# Altium PCB LED.PcbDoc
Units mil, origin at the board's own origin, x right, y up, seen from the top; angles counter-clockwise.
Board outline 1968.5 x 1968.5 mil, 2 copper layers (Top Layer, Bottom Layer); 50 components, 31 nets, 212 pads, 33 vias.
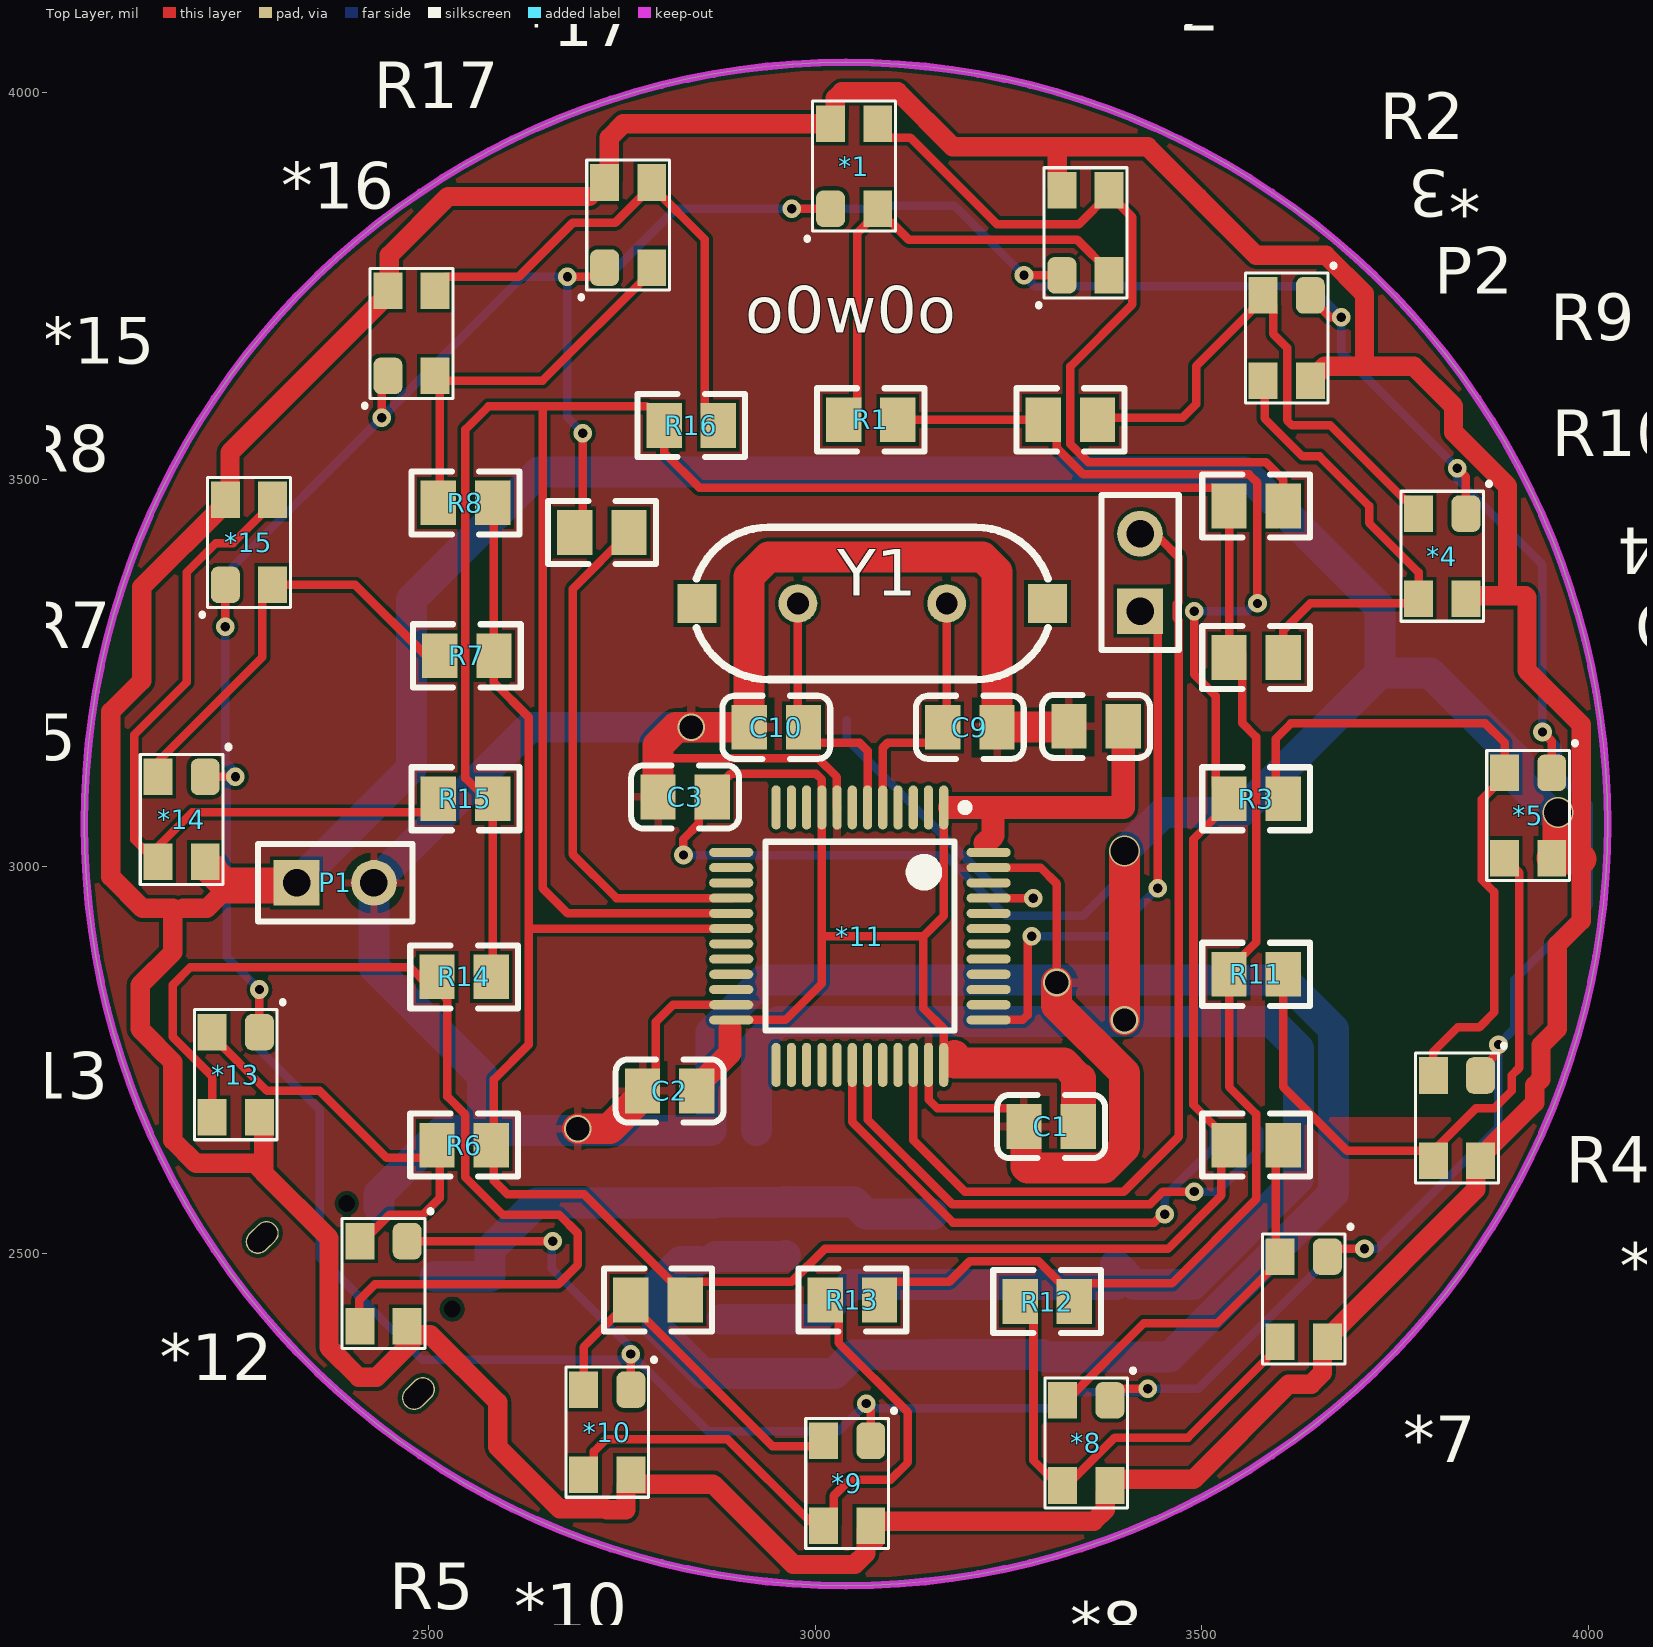
[diagram p0: Top Layer view]
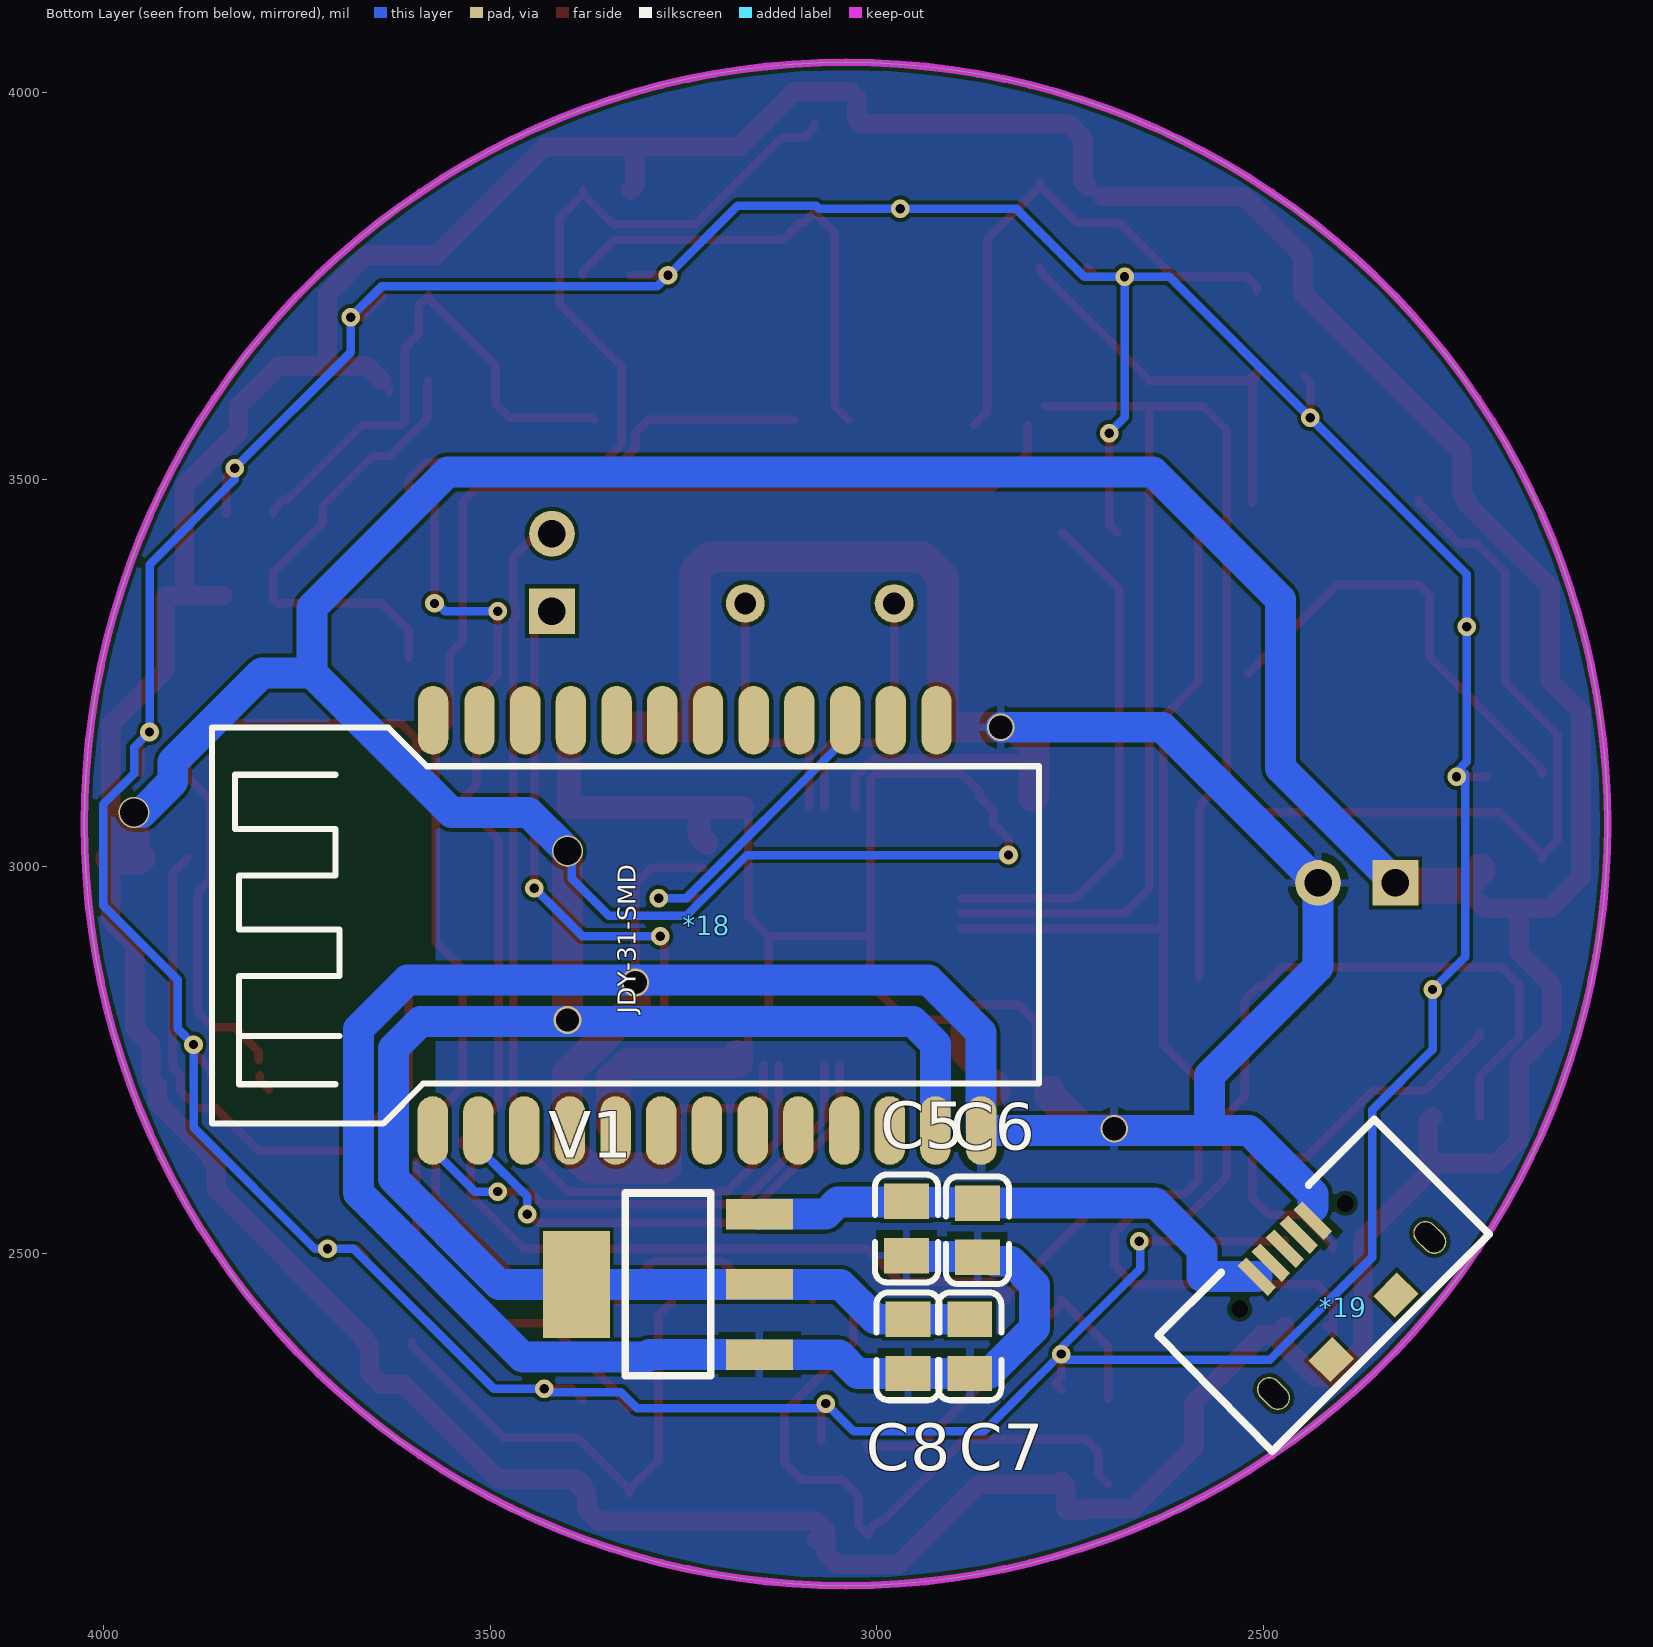
[diagram p1: Bottom Layer view, seen from below]
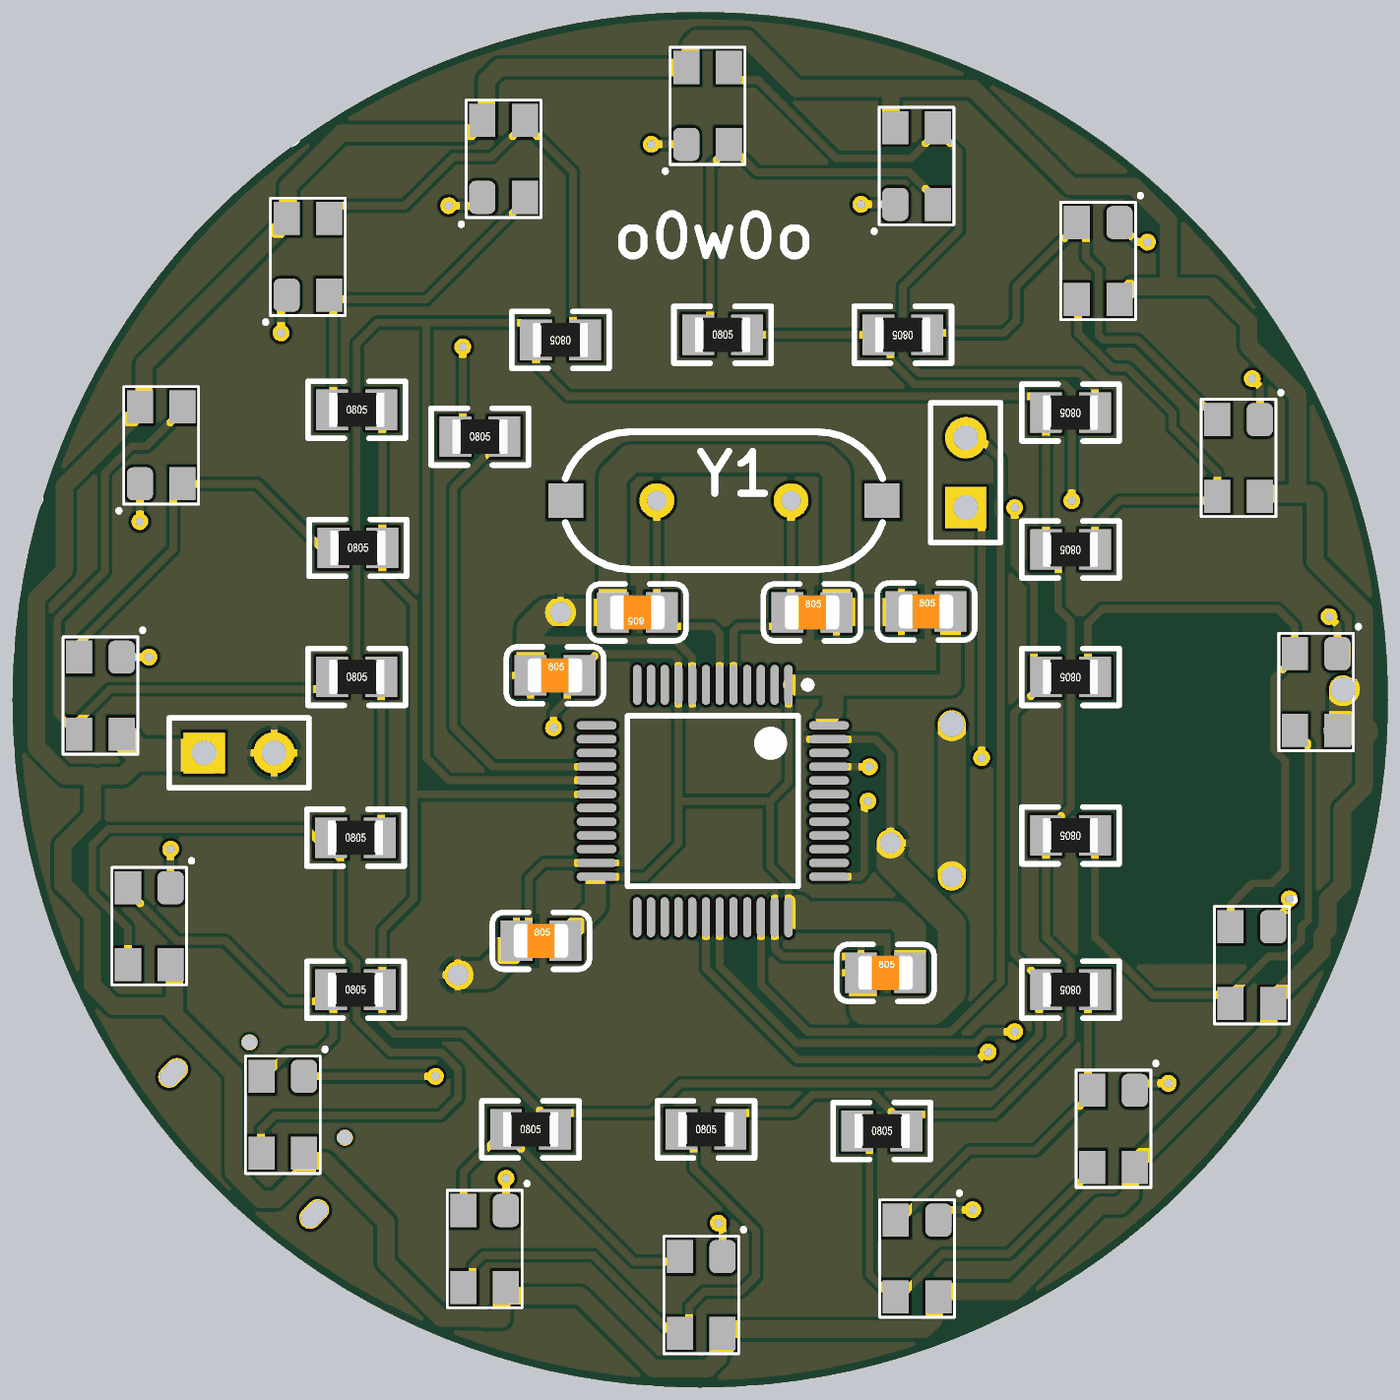
[diagram p2: 3D render of the assembled board from above, using the file's embedded part models]
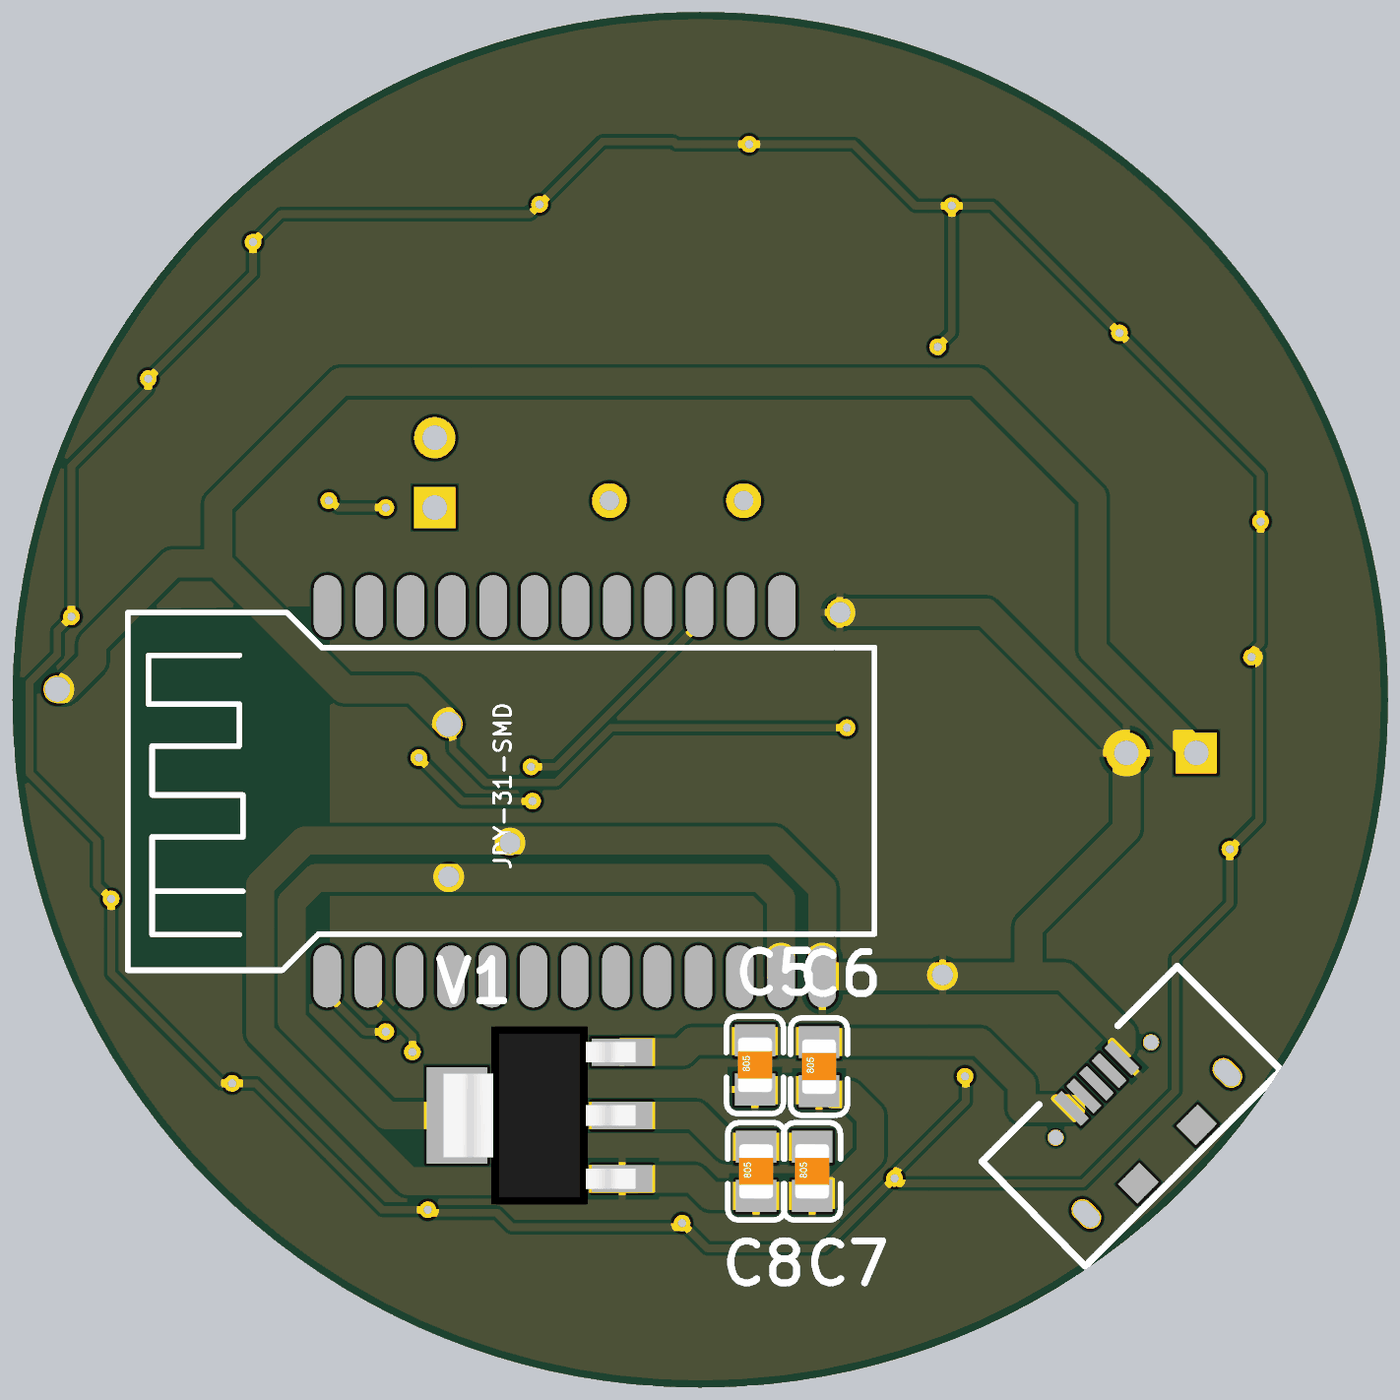
[diagram p3: 3D render of the assembled board from below, using the file's embedded part models]

## Layer stack, top to bottom
Top Solder: solder mask 0.4, Solder Resist, Dk 3.5
Top Layer: signal copper 1.4
Dielectric 1: dielectric 12.6, FR-4, Dk 4.8
Bottom Layer: signal copper 1.4
Bottom Solder: solder mask 0.4, Solder Resist, Dk 3.5

## Board outline
3040,2070.75 cw(c3040,3055) 2055.75,3055 cw(c3040,3055) 3040,4039.25 cw(c3040,3055) 4024.25,3055 cw(c3040,3055)

## Design rules (kind name [scope] priority, off if disabled: settings)
Clearance [All] p1: gap=5 ignorepadtopadclearanceinfootprint=TRUE
PolygonConnect [All] p1: connectstyle=Relief reliefconductorwidth=10 reliefentries=4 polygonreliefangle="90 Angle" airgapwidth=10
RoutingVias [All] p1: holewidth=28 width=50 viastyle="Through Hole" minholewidth=28 minwidth=50 maxholewidth=28 maxwidth=50
ShortCircuit [All] p1: allowed=TRUE
SolderMaskExpansion [All] p1: expansion=4
Width [All] p1: maxlimit=50 minlimit=10 preferedwidth=15 minimp=50.000000 maximp=50.000000 favimp=50.000000
29 further rules are at their usual default settings.

## Components (designator, comment, footprint, x,y, rotation, side; value= is the part's Value field where it differs from the comment)
*1 "RGB_LED" LED_RGB 3082,3916 r270 top
*2 "RGB_LED" LED_RGB 3381,3830 r270 top
*3 "RGB_LED" LED_RGB 3578,3672.04 r90 top
*4 "RGB_LED" LED_RGB 3779,3390 r90 top
*5 "RGB_LED" LED_RGB 3890,3055 r90 top
*6 "RGB_LED" LED_RGB 3798,2664 r90 top
*7 "RGB_LED" LED_RGB 3600,2430 r90 top
*8 "RGB_LED" LED_RGB 3319,2244.2 r90 top
*9 "RGB_LED" LED_RGB 3010,2192.04 r90 top
*10 "RGB_LED" LED_RGB 2700,2258.04 r90 top
*11 "STM32F103" "STM32 C8T6" 3080,2930 r270 top
*12 "RGB_LED" LED_RGB 2411,2450 r90 top
*13 "RGB_LED" LED_RGB 2220,2720 r90 top
*14 "RGB_LED" LED_RGB 2150,3050 r90 top
*15 "RGB_LED" LED_RGB 2300,3430 r270 top
*16 "RGB_LED" LED_RGB 2510,3700 r270 top
*17 "RGB_LED" LED_RGB 2790,3840 r270 top
*18 "BLE" BLE 3290,2901.93 r90 bottom
*19 "usb micro" MICRO_USB 2398.26,2431.64 r135 bottom
C1 "100nF(104) 10% 50V" 0805_C 3305.04,2664.12 r0 top
C2 "100nF(104) 10% 50V" 0805_C 2812.08,2710 r0 top
C3 "100nF(104) 10% 50V" 0805_C 2832.08,3090 r0 top
C4 "100nF(104) 10% 50V" 0805_C 3363.11,3181.18 r0 top
C5 "10nF (103) 10% 50V" 0805_C 2961.73,2532.31 r90 bottom
C6 "100nF(104) 10% 50V" 0805_C 2870,2530 r90 bottom
C7 "100nF(104) 10% 50V" 0805_C 2880,2380 r90 bottom
C8 "10nF (103) 10% 50V" 0805_C 2960,2380 r90 bottom
C9 "22pF (220) 5% 50V" 0805_C 3200,3180 r0 top
C10 "22pF (220) 5% 50V" 0805_C 2950,3180 r180 top
P1 "pwr" HDR1X2 2330,2978.9 r0 top
P2 "ST-LINK" HDR1X2 3420,3330 r90 top
R1 "100Ω (1000) ±1%" 0805_R 3072,3577.33 r0 top
R2 "100Ω (1000) ±1%" 0805_R 3330,3577.33 r180 top
R3 "100Ω (1000) ±1%" 0805_R 3570,3087.63 r180 top
R4 "100Ω (1000) ±1%" 0805_R 3570,2640 r180 top
R5 "100Ω (1000) ±1%" 0805_R 2797.04,2440 r0 top
R6 "100Ω (1000) ±1%" 0805_R 2546.59,2640 r0 top
R7 "100Ω (1000) ±1%" 0805_R 2550,3272.36 r0 top
R8 "100Ω (1000) ±1%" 0805_R 2548.3,3470 r0 top
R9 "100Ω (1000) ±1%" 0805_R 3570,3466 r180 top
R10 "100Ω (1000) ±1%" 0805_R 3570,3270 r180 top
R11 "100Ω (1000) ±1%" 0805_R 3570,2860.79 r180 top
R12 "100Ω (1000) ±1%" 0805_R 3300,2437.8 r0 top
R13 "100Ω (1000) ±1%" 0805_R 3048.16,2440 r0 top
R14 "100Ω (1000) ±1%" 0805_R 2546.59,2857.5 r0 top
R15 "100Ω (1000) ±1%" 0805_R 2548.3,3087.63 r0 top
R16 "100Ω (1000) ±1%" 0805_R 2840,3570 r180 top
R17 "100Ω (1000) ±1%" 0805_R 2724.6,3431.52 r0 top
V1 "AMS1117-5.0" SOT-223 3270,2460 r180 bottom
Y1 "8MHz" XTAL_US 2977.87,3340 r0 top

## Footprints (in the part's own frame and the unit in brackets; to place one, negate y for a bottom-side part, rotate by r counter-clockwise, add the part's x,y. Pads: shape width x height; smd on the part's side, far side on the other; paste and mask are expansions set on the pad)
0805_C [mm]
  rect 1.16x1.47 smd: 1(-0.89,0) 2(0.89,0)
  silkscreen extent -1.77,-1.04 1.77,1.04, body extent -1,-0.62 1,0.63, height 0.77
0805_R [mm]
  rect 1.16x1.47 smd: 1(-0.89,0) 2(0.89,0)
  silkscreen extent -1.77,-1.04 1.77,1.03, body extent -1,-0.62 1,0.63, height 0.49
BLE [mil]
  oval 88.74x39.37 smd: 1(-243,284) 2(-243,224.94) 3(-243,165.89) 4(-243,106.84) 5(-243,47.78) 6(-243,-11.28) 7(-243,-70.33) 8(-243,-129.39) 9(-243,-188.44) 10(-243,-247.5) 11(-243,-306.55) 12(-243,-365.61) 13(-243,-424.66) 14(287,-366.95) 15(287,-307.89) 16(287,-248.83) 17(287,-189.78) 18(287,-130.72) 19(287,-71.67) 20(287,-12.61) 21(287,46.44) 22(287,105.5) 23(287,164.55) 24(287,223.61) 25(287,283.57)
  silkscreen extent -234,-499 278,569
HDR1X2 [mm] "Connector; Header; 2 Position"
  rect 1.5x1.5 hole 0.9: 1(0,0)
  round 1.5 hole 0.9: 2(2.54,0)
  silkscreen extent -1.27,-1.27 3.81,1.27
LED_RGB [mil]
  rrect50% 47.24x37.4 smd: 1(66,-62)
  rect 47.24x37.4 smd: 2(-44,-62) 3(-44,-1) 4(66,-1)
  silkscreen extent -73,-92 105,22
MICRO_USB [mm]
  rect 0.4x1.4 smd: 1(-1.3,2.678) 5(1.3,2.678) D+(0,2.678) D-(-0.65,2.678) ID(0.65,2.678)
  oval 0.8x1.2 hole 0.7 slot 1.1 at 90 deg: GND(-3.625,-0.422) GND(3.625,-0.422)
  rect 1.1x1 smd: GND(-1.5,-0.972) GND(1.5,-0.972)
  silkscreen extent -4.99,-1.73 5.08,3.61
SOT-223 [mm]
  rect 2.2x1 smd: 1(3,-2.3) 2(3,0) 3(3,2.3)
  rect 2.2x3.5 smd: 2(-3,0)
  silkscreen extent -1.4,-3 1.4,3, body extent -3.49,-3.24 3.49,3.24, height 1.64
"STM32 C8T6" [mm]
  oval 1.45x0.3 smd: 1(-3.717,2.191) 2(-3.717,1.691) 3(-3.717,1.191) 4(-3.717,0.691) 5(-3.717,0.191) 6(-3.717,-0.309) 7(-3.717,-0.809) 8(-3.717,-1.309) 9(-3.717,-1.809) 10(-3.717,-2.309) 11(-3.717,-2.809) 12(-3.717,-3.309) 25(4.733,-3.309) 26(4.733,-2.809) 27(4.733,-2.309) 28(4.733,-1.809) 29(4.733,-1.309) 30(4.733,-0.809) 31(4.733,-0.309) 32(4.733,0.191) 33(4.733,0.691) 34(4.733,1.191) 35(4.733,1.691) 36(4.733,2.191)
  oval 0.3x1.45 smd: 13(-2.242,-4.784) 14(-1.742,-4.784) 15(-1.242,-4.784) 16(-0.742,-4.784) 17(-0.242,-4.784) 18(0.258,-4.784) 19(0.758,-4.784) 20(1.258,-4.784) 21(1.758,-4.784) 22(2.258,-4.784) 23(2.758,-4.784) 24(3.258,-4.784) 37(3.258,3.666) 38(2.758,3.666) 39(2.258,3.666) 40(1.758,3.666) 41(1.258,3.666) 42(0.758,3.666) 43(0.258,3.666) 44(-0.242,3.666) 45(-0.742,3.666) 46(-1.242,3.666) 47(-1.742,3.666) 48(-2.242,3.666)
  silkscreen extent -3.84,-3.66 3.61,3.02, body extent -2.99,-4.06 4.01,2.94, height 1.6
XTAL_US [mil]
  round 50 hole 28: 1(0,0) 2(192.13,0)
  rect 50x50 smd: ""(-130.32,0) ""(322.44,0)
  silkscreen extent -131,-98 323,98

## Part data
C1 C2 C3 C4 C6 C7: library part "0805 100nF(104) 10% 50V", "贴片电容", Package=0805, SuppliersPartNumber=C49678, ComponentLink1Description=¹©Ó, ComponentLink1URL=http://www.szlcsc.com/product/details_50686.html, Supplier=LC
C5 C8: library part "0805 10nF (103) 10% 50V", "贴片电容", Package=0805, SuppliersPartNumber=C1710, ComponentLink1Description=¹©Ó, ComponentLink1URL=http://www.szlcsc.com/product/details_2062.html, Supplier=LC
C9 C10: library part "0805 22pF (220) 5% 50V", "贴片电容", Package=0805, SuppliersPartNumber=C1804, ComponentLink1Description=¹©Ó, ComponentLink1URL=http://www.szlcsc.com/product/details_2156.html, Supplier=LC
P1 P2: library part "Header 2", "Header, 2-Pin", LatestRevisionDate=17-Jul-2002, LatestRevisionNote="Re-released for DXP Platform.", Publisher="Altium Limited"
R1 R2 R3 R4 R5 R6 R7 R8 R9 R10 R11 R12 R13 R14 R15 R16 R17: library part "0805 100Ω (1000) 1%", "贴片电阻", Package=0805, SuppliersPartNumber=C17408, ComponentLink1Description=¹©Ó, ComponentLink1URL=http://www.szlcsc.com/product/details_18096.html, Supplier=LC
V1: library part "SOT-223 AMS1117-5.0", "低压差线性稳压(LDO)", Package=SOT-223, SuppliersPartNumber=C6187, ComponentLink1Description=¹©Ó, ComponentLink1URL=http://www.szlcsc.com/product/details_6653.html, Supplier=LC
Y1: library part XTAL, "Crystal Oscillator", LatestRevisionDate=17-Jul-2002, LatestRevisionNote="Re-released for DXP Platform.", Published=8-Jun-2000, Publisher="Altium Limited"

## Via types
v1: diameter 24, hole 12, Top Layer to Bottom Layer, 25 vias
v2: diameter 36, hole 30, Top Layer to Bottom Layer, 4 vias
v3: diameter 40, hole 36, Top Layer to Bottom Layer, 2 vias
v4: diameter 19.68/19.68 (per signal layer), hole 21.65, Top Layer to Bottom Layer, 2 vias

## Nets (pads, with @x,y where several pads share a name; then routed paths per layer and width w, separated by ;. In a path a pad name is that pad's centre, name@x,y a point inside that pad or via, vN(x,y) a via of type N, cw(c..) or ccw(c..) an arc to the next point about the centre after c; other vN are vias at no path point)
3.3v: *1.2 *2.2 *3.2 *4.2 *5.2 *6.2 *7.2 *8.2 *9.2 *10.2 *11.1 *11.9 *11.24 *11.36 *11.48 *12.2 *13.2 *14.2 *15.2 *16.2 *17.2 *18.12 C1.2 C2.2 C3.2 C4.2 C7.2 C8.2 P1.1 V1.2 | length 14685.7
  Top Layer w11: 2170,2932.2 2183.8,2946 ; *14.2 *14.2@2221,2997 ; *13.2@2282,2671.08 *13.2 ; 2708.6,3865.88 2714.8,3865.88 *17.2@2728,3879.08 ; v1(2830,3014.92) 2830,3035.61 2849.78,3055.39 2849.78,3072.67 C3.2 2867.12,3096.1 2891.02,3120 3001.24,3120 3008.79,3112.45 *11.9 3008.79,2910 ; *11.24 2961.73,2801.73 3008.79,2848.79 3008.79,2910 ; *9.2@3065.8,2124.88 3072,2131.08 *9.2@3072,2136 ; *11.36 3166.27,2790.43 3140,2816.69 3140,2910 ; *11.1 3166.27,2936.27 3140,2910 ; *3.2@3630,3613.12 *3.2@3630,3618.04 ; *4.2 *4.2@3845,3350 ; 3008.79,2910 3140,2910
  Top Layer w25: 2183.8,2946 2214.05,2946 2232.93,2964.88 2315.98,2964.88 P1.1 ; *13.2 2287.44,2670.56 2287.44,2605.44 ; *12.2 2473,2401.08 2479.2,2394.88 2503,2394.88 2590,2307.88 2590,2250 2670,2170 2729.57,2170 2730.8,2168.77 2755.8,2168.77 2755.8,2199.8 *10.2@2762,2206 ; *12.2@2478.2,2384.88 2433.32,2340 2410.46,2340 2371.88,2378.58 2371.88,2520 2287.44,2604.43 2287.44,2605.44 ; 2708.6,3865.88 2525.88,3865.88 2450,3790 2450,3741.08 2244.04,3535.12 2244.04,3480.04 *15.2 2238,3469.08 2130,3361.08 2130,3240 2090,3200 2090,2987 2131,2946 2170,2946 2170,2932.2 2170,2889.1 2127.8,2846.9 2127.8,2790 2151,2766.8 2151,2766.3 2170,2747.3 2170,2646.44 2200,2616.44 2276.44,2616.44 2287.44,2605.44 ; *17.2@2728,3879.08 2734.2,3885.28 2734.2,3941.88 2752.32,3960 *1.2 3026.2,3966.2 3026.2,3992.68 3034.64,4001.12 3106.95,4001.12 3178.07,3930 3312.3,3930 ; *10.2@2762,2202 2868,2202 2971.98,2098.02 3051.15,2098.02 3065.8,2112.66 3065.8,2124.88 3065.8,2141.84 *9.2 3078.04,2154.08 3360.15,2154.08 3374.8,2168.72 3374.8,2189.8 3381,2196 *8.2 3381,2201.92 3387.2,2208.12 3489.04,2208.12 3612.08,2331.15 3641.15,2331.15 3655.8,2345.8 3655.8,2379.8 *7.2 3662,2390.92 3853.8,2582.72 3853.8,2613.8 *6.2 3860,2624.92 3930,2694.92 3930,2717.37 3938,2725.37 3938,2769 3959,2790 3959,2899 3990,2930 3990,3010 3990,3183.56 3920,3253.56 3920,3347.8 3917.8,3350 3894.8,3350 ; *9.2@3072,2136 *9.2@3078,2130 ; *2.2 3312.8,3880.2 3312.8,3929.5 3312.3,3930 ; *8.2@3381.54,2195.46 *8.2@3387.2,2201.12 ; *3.2 3658.31,3646.34 3710,3646.34 ; *4.2@3845,3350 3894.8,3350 ; 3312.3,3930 3430,3930 3495,3865 3495,3864.88 3569.88,3790 3660,3790 3710,3740 3710,3646.34 ; 3710,3646.34 3773.66,3646.34 3825,3595 3825,3561.36 3894.8,3491.57 3894.8,3350
  Top Layer w30: C2.2 2847.12,2716.1 2849.95,2718.94 2890,2758.98 2890,2790 ; 3173.6,3076.34 3230,3076.34 ; 3220,3030 3230,3040 3230,3076.34 ; C4.2 3398.15,3076.34 3230,3076.34
  Top Layer w40: *14.2@2221,2997 2221,2994 2236.1,2978.9 P1.1 ; C2.2 2849.95,2712.83 C2.2@2849.95,2718.94 ; 3180,2756 3180,2746.17 3321.43,2746.17 3337.98,2729.63 3337.98,2666.22 C1.2 3342.91,2666.96 3342.91,2726.43 ; v2(3400,2801.73) v3(3400,3020) ; v3(3960,3070) 3960,3019 *5.2 3953,3010 3990,3010
  Bottom Layer w11: v1(2830,3014.92) 3167.86,3014.92 3246.22,2936.56 3346.56,2936.56 3394.45,2984.45 3394.45,3014.45 v3(3400,3020)
  Bottom Layer w40: P1.1 2478.74,3127.64 2478.74,3345.31 2643.43,3510 3555,3510 3730,3335 3730,3250.41 3549.59,3070 3450,3070 v3(3400,3020) ; C7.2 C8.2 3002.04,2415.04 3047,2460 3151.89,2460 3388.11,2460 3388.11,2485.59 3413.7,2460 3488.36,2460 3625,2596.64 3625,2765 3590,2800 2953.43,2800 2924.39,2770.96 *18.12 ; 3730,3250 3795,3250 3910,3135 3910,3110 3950,3070 v3(3960,3070)
BLE_RST: *18.11
GND: *11.8 *11.23 *11.35 *11.47 *18.13 *19.5 C1.1 C2.1 C3.1 C4.1 C5.1 C6.1 C7.1 C8.1 C9.2 C10.2 P1.2 V1.1 | length 6266.8
  Top Layer w11: C2.1 2794.37,2727.33 2794.37,2799.41 2816.38,2821.42 *11.23 ; C3.1 2804.96,3097.92 2804.96,3133.56 2811.4,3140 3003.86,3140 3028.32,3115.55 3028.32,3076.49 *11.8 ; *11.35 3146.74,2743.51 3146.74,2698.89 3158.07,2687.56 3252.67,2687.56 3270,2670.22 C1.1 ; *11.47 3291.42,2998.58 3312.3,2977.7 v2(3312.3,2850)
  Top Layer w40: v2(2693.3,2661.21) 2734.35,2661.21 2777.04,2703.9 C2.1 ; C3.1 2797.04,3156.57 2820.47,3180 v2(2840,3180) C10.2@2914.69,3180 ; C10.2 C10.2@2914.69,3180 ; C1.1 3272.83,2661.29 3272.83,2612.09 3274.74,2610.18 3373.27,2610.18 3400,2636.92 3400,2732.98 3312.3,2820.69 v2(3312.3,2850) ; C4.1 3327.48,3180.59 3235.63,3180.59 C9.2 3235.04,3381.53 3216.57,3400 2940,3400 2914.69,3374.69 C10.2@2914.69,3180
  Bottom Layer w40: 2436.62,2559.53 2436.62,2576.62 2518.93,2658.93 2570,2658.93 ; v2(2840,3180) 2631.1,3180 P1.2 2430,2870 2570,2730 2570,2658.93 ; C6.1@2848.94,2490 2827,2490 2796.57,2459.57 2796.57,2403.43 2855.04,2344.96 C7.1 C8.1 3024.96,2344.96 3049.13,2369.13 3151.57,2369.13 V1.1 3293.82,2369.45 3297.17,2366.1 3458.1,2366.1 3670,2578 3670,2790 3606.44,2853.56 2933.56,2853.56 2865.34,2785.34 *18.13 2570,2658.93 ; C6.1 2871.16,2496.12 2960.58,2496.12 C5.1
LED_B: *11.18 R1.2 R2.2 R3.2 R4.2 R5.2 R6.2 R7.2 R8.2 | length 3777.1
  Top Layer w11: R8.2@2585.04,3470 R7.2 2585.04,3237.87 2630,3192.91 2630,2919.84 ; R5.2 R5.2@2832.08,2446.1 ; *11.18 2630,2919.84 ; R1.2 R2.2 3312.3,3560 3312.3,3540.83 3346.48,3506.64 3560.94,3506.64 3571.7,3495.88 v1(3571.7,3340) ; v1(3490,3330) 3490,3248.34 3517.63,3220.71 3517.63,3104.96 R3.2 3534.96,3081.52 3489.04,3035.61 3489.04,2692.02 3534.96,2646.1 R4.2 ; R4.2@3524.96,2618.41 3524.96,2574.96 3456,2506 3012.5,2506 2969.93,2463.44 2849.41,2463.44 R5.2@2832.08,2446.1 ; 2630,2919.84 2630,2770 2585.04,2725.04 2585.04,2593.9 2602.37,2576.56 2701.62,2576.56 R5.2@2832.08,2446.1
  Bottom Layer w11: v1(3490,3330) 3558.19,3330 3568.19,3340 v1(3571.7,3340)
LED_G: *11.17 R9.2 R10.2 R11.2 R12.2 R13.2 R14.2 R15.2 R16.2 | length 4173.4
  Top Layer w11: R14.2@2583.33,2857.5 2583.33,3073.3 2581.63,3075 2581.63,3081.1 2548.3,3114.44 2548.3,3564.98 2577.98,3594.67 2647.96,3594.67 ; R16.2@2782.37,3594.67 2647.96,3594.67 ; R16.2 2804.96,3535.04 2850.56,3489.44 3517.63,3489.44 3534.96,3472.1 R9.2 3534.96,3292.5 3552.3,3275.17 3552.3,3185.2 3570,3167.5 3570,2901.93 3534.96,2866.89 R11.2 3534.96,2715.31 3570,2680.28 3570,2570 3461.23,2461.23 3352.37,2461.23 R12.2@3335.04,2443.9 ; *11.17 2891.51,2939.68 2680.32,2939.68 2647.96,2972.04 2647.96,3594.67 ; R13.2 3083.2,2446.1 3100.53,2463.44 3173.44,2463.44 3200.01,2490 3288.94,2490 R12.2@3335.04,2443.9 ; R12.2 R12.2@3335.04,2443.9
LED_R: *11.16 R17.2 | length 674.2
  Top Layer w11: R17.2 2686.8,3358.68 2686.8,3015.8 2743.39,2959.21 *11.16
LINK_STA: *11.45 *18.16 | length 408.5
  Top Layer w11: *11.45 3224.49,2959.06 v1(3282.14,2959.06)
  Bottom Layer w11: *18.16 3041.17,3164.24 3246.35,2959.06 v1(3282.14,2959.06)
Net*1_1: *1.1 *2.1 *3.1 *4.1 *5.1 *6.1 *7.1 *8.1 *9.1 *10.1 *12.1 *13.1 *14.1 *15.1 *16.1 *17.1 R17.1 | length 7153
  Top Layer w11: *14.1 v1(2251,3116) ; v1(2238,3310) *15.1 ; *13.1 v1(2282,2841.1) ; v1(2440,3580) 2440,3626 *16.1 ; *12.1 2473,2517.09 2474.09,2516 v1(2661,2516) ; v1(2680,3762.12) 2716.12,3762.12 *17.1 ; R17.1 2700,3441.96 v1(2700,3560) ; *10.1 2770,2332.04 2762,2340.04 v1(2762,2370) ; v1(2970,3850) *1.1 ; v1(3066,2306.04) 3072,2300.04 *9.1 ; v1(3270,3764) *2.1 ; *8.1 3381,2312.21 3393.91,2325.12 v1(3430,2325.12) ; *3.1 3640,3735.2 3665.2,3710 v1(3680,3710) ; *7.1 3672,2506 v1(3710,2506) ; v1(3830,3514.65) 3841,3503.65 *4.1 ; *6.1 3860,2737.01 3880.64,2757.65 3880.64,2767.51 v1(3883.13,2770) ; v1(3940,3173.9) 3952,3161.9 *5.1
  Bottom Layer w11: v1@2240,3120 2240,2883.1 v1(2282,2841.1) 2282,2763.54 2360,2685.54 2360,2495.04 2492.22,2362.82 2754.82,2362.82 v1(2762,2370) ; v1@2246.48,3120 2250,3123.52 2238,3135.52 v1(2238,3310) 2238,3378 v1(2440,3580) 2622.12,3762.12 v1(2680,3762.12) ; v1@2660,2506 2660,2480 2762,2378 v1(2762,2370) ; v1(2700,3560) 2700,3560.3 2680,3580.3 v1(2680,3762.12) ; v1@3430,2320.92 3331,2320.92 3310.08,2300 3060,2300 3030,2270 2862,2270 v1(2762,2370) ; v1(3430,2325.12) 3495.12,2325.12 3676,2506 v1(3710,2506) 3726,2506 3883.13,2663.13 v1(3883.13,2770) 3903.56,2790.43 3903.56,2853.56 4000,2950 4000,3080 3960,3120 3960,3153.9 v1(3940,3173.9) 3940,3390 3830,3500 v1(3830,3514.65) 3680,3664.65 v1(3680,3710) 3640,3750 3284,3750 v1(3270,3764) 3180,3854 3078.76,3854 3074.76,3850 v1(2970,3850) 2820,3850 2732.12,3762.12 v1(2680,3762.12)
Net*1_3: *1.3 *2.3 R9.1 | length 1073.7
  Top Layer w11: *1.3 3081,3955.08 3094.2,3941.88 3123.16,3941.88 3235.04,3830 3340.92,3830 *2.3@3380,3869.08 ; *2.3 *2.3@3380,3869.08 ; R9.1 3605.04,3500 3582.4,3522.64 3353.11,3522.64 3330,3545.75 3330,3646.34 3410,3726.34 3410,3839.08 *2.3@3380,3869.08
Net*1_4: *1.4 *2.4 R1.1 | length 626.4
  Top Layer w11: R1.1 3054.3,3594.67 3054.3,3818.37 *1.4@3081,3845.08 ; *1.4 *1.4@3081,3845.08 ; *2.4 3380,3768.92 3338.92,3810 3121,3810 3099.12,3831.88 3094.2,3831.88 *1.4@3081,3845.08
Net*3_3: *3.3 *4.3 R10.1 | length 605.2
  Top Layer w11: *3.3 3580.92,3626.12 3580.92,3579.08 3630,3530 3652,3530 3716,3466 3716,3444 3780,3380 *4.3 3774,3340 3640,3340 3605.04,3305.04 R10.1
Net*3_4: *3.4 *4.4 R2.1 | length 709.4
  Top Layer w11: R2.1 3367.7,3580 3475.04,3580 3492.37,3597.33 3492.37,3646.49 3579,3733.12 *3.4 3592.2,3724.84 3592.2,3688.24 3610,3670.44 3610,3576.44 3616.44,3570 3666,3570 3761.88,3474.12 3766.8,3474.12 3780,3460.92 *4.4
Net*5_3: *5.3 *6.3 R11.1 | length 819.7
  Top Layer w11: R11.1 3605.04,2715.18 3687.43,2632.8 3799,2632.8 3853.76,2687.56 3877.56,2687.56 3900,2710 3900,2730 3910,2740 3910,2992 *5.3
Net*5_4: *5.4 *6.4 R3.1 | length 870.4
  Top Layer w11: R3.1@3595.04,3110 3595.04,3165.04 3615.04,3185.04 3640,3185.04 3866.14,3185.04 3891,3160.18 3891,3116.08 3861.8,3086.88 3861.8,2983.03 3877.56,2967.27 3877.56,2811.54 3858.22,2792.2 3830.28,2792.2 3799,2760.92 *6.4@3799,2750 ; *6.4@3785.8,2711.88 3797.85,2723.93 *6.4@3797.85,2730
Net*7_3: *7.3 *8.3 R12.1 | length 633.6
  Top Layer w11: R12.1 3282.3,2420.46 3282.3,2232.63 *8.3@3320,2194.92 ; *8.3@3320,2190 *8.3@3320,2194.92 ; *7.3 3601,2381.08 3482.02,2262.1 3387.18,2262.1 *8.3@3320,2194.92
Net*7_4: *7.4 *8.4 R4.1 | length 492.8
  Top Layer w11: *8.4@3320,2300 3330,2310 3330,2314.92 3425.08,2410 3519.92,2410 3601,2491.08 3601,2493.41 3595.04,2499.37 R4.1@3595.04,2618.41
Net*9_3: *9.3 *10.3 R13.1 | length 829.5
  Top Layer w11: *10.3@2701,2202 2714.2,2215.2 2714.2,2244.2 2730,2260 2887,2260 2992.88,2154.12 2997.8,2154.12 3011,2140.92 3011,2136 3024.2,2149.2 3024.2,2186.86 3044.94,2207.6 3097.6,2207.6 3120,2230 3120,2294.8 3030.45,2384.35 3030.45,2422.67 R13.1
Net*9_4: *9.4 *10.4 R5.1 | length 492.1
  Top Layer w11: *10.4@2701,2312 2701,2379 2758.95,2436.95 R5.1 2762,2433.9 2944.98,2250.92 3011,2250.92 *9.4@3011,2246 ; *9.4@3011,2251.08 *9.4@3013.12,2253.2
Net*12_3: *12.3 *13.3 R14.1 | length 1381.4
  Top Layer w11: *13.3 2221,2728.83 2170,2779.83 2170,2847.11 2192.89,2870 2476.38,2870 2501.52,2844.85 2507.63,2844.85 2524.96,2827.52 2524.96,2702.68 2548.3,2679.35 2548.3,2598.27 2596.22,2550.34 2669.22,2550.34 2693.3,2526.26 2693.3,2485.17 2668.12,2460 2431,2460 2411,2440 *12.3@2411,2396 ; *12.3 *12.3@2419.33,2406
Net*12_4: *12.4 *13.4 R6.1 | length 550
  Top Layer w11: *13.4 2221,2781.08 2291.96,2710.12 2359.88,2710.12 2446.56,2623.44 2514.96,2623.44 2514.96,2571.64 2493.66,2550.34 2450.42,2550.34 2411,2510.92 *12.4@2411,2506
Net*14_3: *14.3 *15.3 R15.1 | length 962.1
  Top Layer w11: *14.3@2140,3010 *14.3@2140,3014.92 ; *15.3 2299,3469.08 2247.86,3417.94 2225.74,3417.94 2187.87,3380.07 2187.87,3237.87 2120,3170 2120,3034.92 *14.3@2140,3014.92 ; R15.1@2519.88,3070 2195.08,3070 *14.3@2140,3014.92
Net*14_4: *14.4 *15.4 R7.1 | length 578
  Top Layer w11: *14.4@2140,3120 2140,3124.92 2285.8,3270.72 2285.8,3350.8 *15.4 2405.88,3364 2497.52,3272.36 R7.1@2519.88,3250
Net*16_3: *16.3 *17.3 R16.1 | length 688.5
  Top Layer w11: *16.3 2509,3748.92 2522.2,3762.12 2617.04,3762.12 2686.8,3831.88 2741.8,3831.88 *17.3@2789,3879.08 ; *17.3 *17.3@2789,3879.08 ; R16.1 2857.7,3587.33 2857.7,3810.37 *17.3@2789,3879.08
Net*16_4: *16.4 *17.4 R8.1 | length 519.2
  Top Layer w11: R8.1@2514.96,3470 2514.96,3510 2514.96,3628.04 *16.4 2509,3638.92 2519.88,3628.04 2647.96,3628.04 2789,3769.08 *17.4
OSC_IN: *11.5 C9.1 Y1.2 | length 329.3
  Top Layer w11: *11.5 3087.53,3153.56 3093.97,3160 3147.63,3160 3154.96,3167.33 3154.96,3170 C9.1 3170,3185.04 Y1.2
OSC_OUT: *11.6 C10.1 Y1.1 | length 335.4
  Top Layer w11: Y1.1 2977.87,3186.9 2984.77,3180 2984.77,3173.9 2998.67,3160 3057.56,3160 3067.84,3149.72 *11.6
PA13: *11.34 P2.2 | length 1310.9
  Top Layer w11: *11.34 3126.9,2646.48 3193.69,2579.68 3398.82,2579.68 3470,2650.87 3470,3318.18 3467.5,3320.68 3467.5,3339.32 3470,3341.82 3470,3399.68 3447.66,3422.03 3427.97,3422.03 P2.2
PA14: *11.37 P2.1 | length 712.8
  Top Layer w11: *11.37 3268.29,2801.73 3274.74,2808.18 3274.74,2904.74 v1(3280,2910) ; P2.1 3442.68,3307.32 v1(3442.68,2972.04)
  Bottom Layer w11: v1(3280,2910) 3380.64,2910 v1(3442.68,2972.04)
RXD: *11.31 *18.1 | length 676
  Top Layer w11: *11.31 3067.84,2673.05 3177.21,2563.68 3433,2563.68 3449.31,2580 v1(3490,2580)
  Bottom Layer w11: v1(3490,2580) 3519.76,2580 3574,2634.24 *18.1
TXD: *11.30 *18.2 | length 670.1
  Top Layer w11: *11.30 3048.16,2670.11 3178.27,2540 3438.27,2540 3449.13,2550.87 v1(3452,2550.87)
  Bottom Layer w11: v1(3452,2550.87) 3452,2573.54 3467.5,2589.04 3467.5,2589.32 3480.68,2602.5 3480.96,2602.5 3514.94,2636.48 *18.2
VCC: *19.1 C5.2 C6.2 V1.3 | length 710.7
  Bottom Layer w40: *19.1 2580,2470 2580,2505.13 2639.91,2565.04 C6.2 2871.16,2566.19 2960.58,2566.19 C5.2 2962.75,2566.33 3050.67,2566.33 3066.13,2550.87 3151.57,2550.87 V1.3
pads on no net: *11.2 *11.3 *11.4 *11.7 *11.10 *11.11 *11.12 *11.13 *11.14 *11.15 *11.19 *11.20 *11.21 *11.22 *11.25 *11.26 *11.27 *11.28 *11.29 *11.32 *11.33 *11.38 *11.39 *11.40 *11.41 *11.42 *11.43 *11.44 *11.46 *18.3 *18.4 *18.5 *18.6 *18.7 *18.8 *18.9 *18.10 *18.14 *18.15 *18.17 *18.18 *18.19 *18.20 *18.21 *18.22 *18.23 *18.24 *18.25 *19.D+ *19.D- *19.GND *19.ID Y1.
copper on no net:
  other v4: 2531.27,2428.24 2394.86,2564.65

## Polygon pours and split planes (outlines as drawn)
GND on Top Layer "Top Layer-GND" (solid, pour order 10): 3040,2070.75 cw(c3040,3055) 2055.75,3055 cw(c3040,3055) 3040,4039.25 cw(c3040,3055) 4024.25,3055 cw(c3040,3055)
GND on Top Layer "Top Layer-GND 1" (solid, pour order 8): 3040,2070.75 cw(c3040,3055) 2055.75,3055 cw(c3040,3055) 3040,4039.25 cw(c3040,3055) 4024.25,3055 cw(c3040,3055)
GND on Bottom Layer "Bottom Layer-GND" (solid, pour order 12): 3040,2070.75 cw(c3040,3055) 2055.75,3055 cw(c3040,3055) 3040,4039.25 cw(c3040,3055) 4024.25,3055 cw(c3040,3055)

## Keep-outs
Keep-Out Layer:
  circle w10: c3040,3055 r984.25

## Other copper
Top Layer:
  pour cut-out: 3571.7,3173.9 3580.92,3164.68 3580.92,2676 3852.45,2676 3858.22,2670.22 3866.14,2678.14 3866.14,3185.04
Bottom Layer:
  pour cut-out: 3573.57,3188.93 3570,3185.36 3570,2670 3860,2670 3860,3185

## Silkscreen, mask and mechanical layers (free items; w line width, h text height)
Top Overlay:
  text "o0w0o" at 2910,3690 h60

## Text inside footprints (layer, text, board x,y; h text height)
*18: Bottom Overlay "JDY-31-SMD" at 3311.57,2809.93 h23.62 r270